# Allegro board FEB_DET_1V0.brd
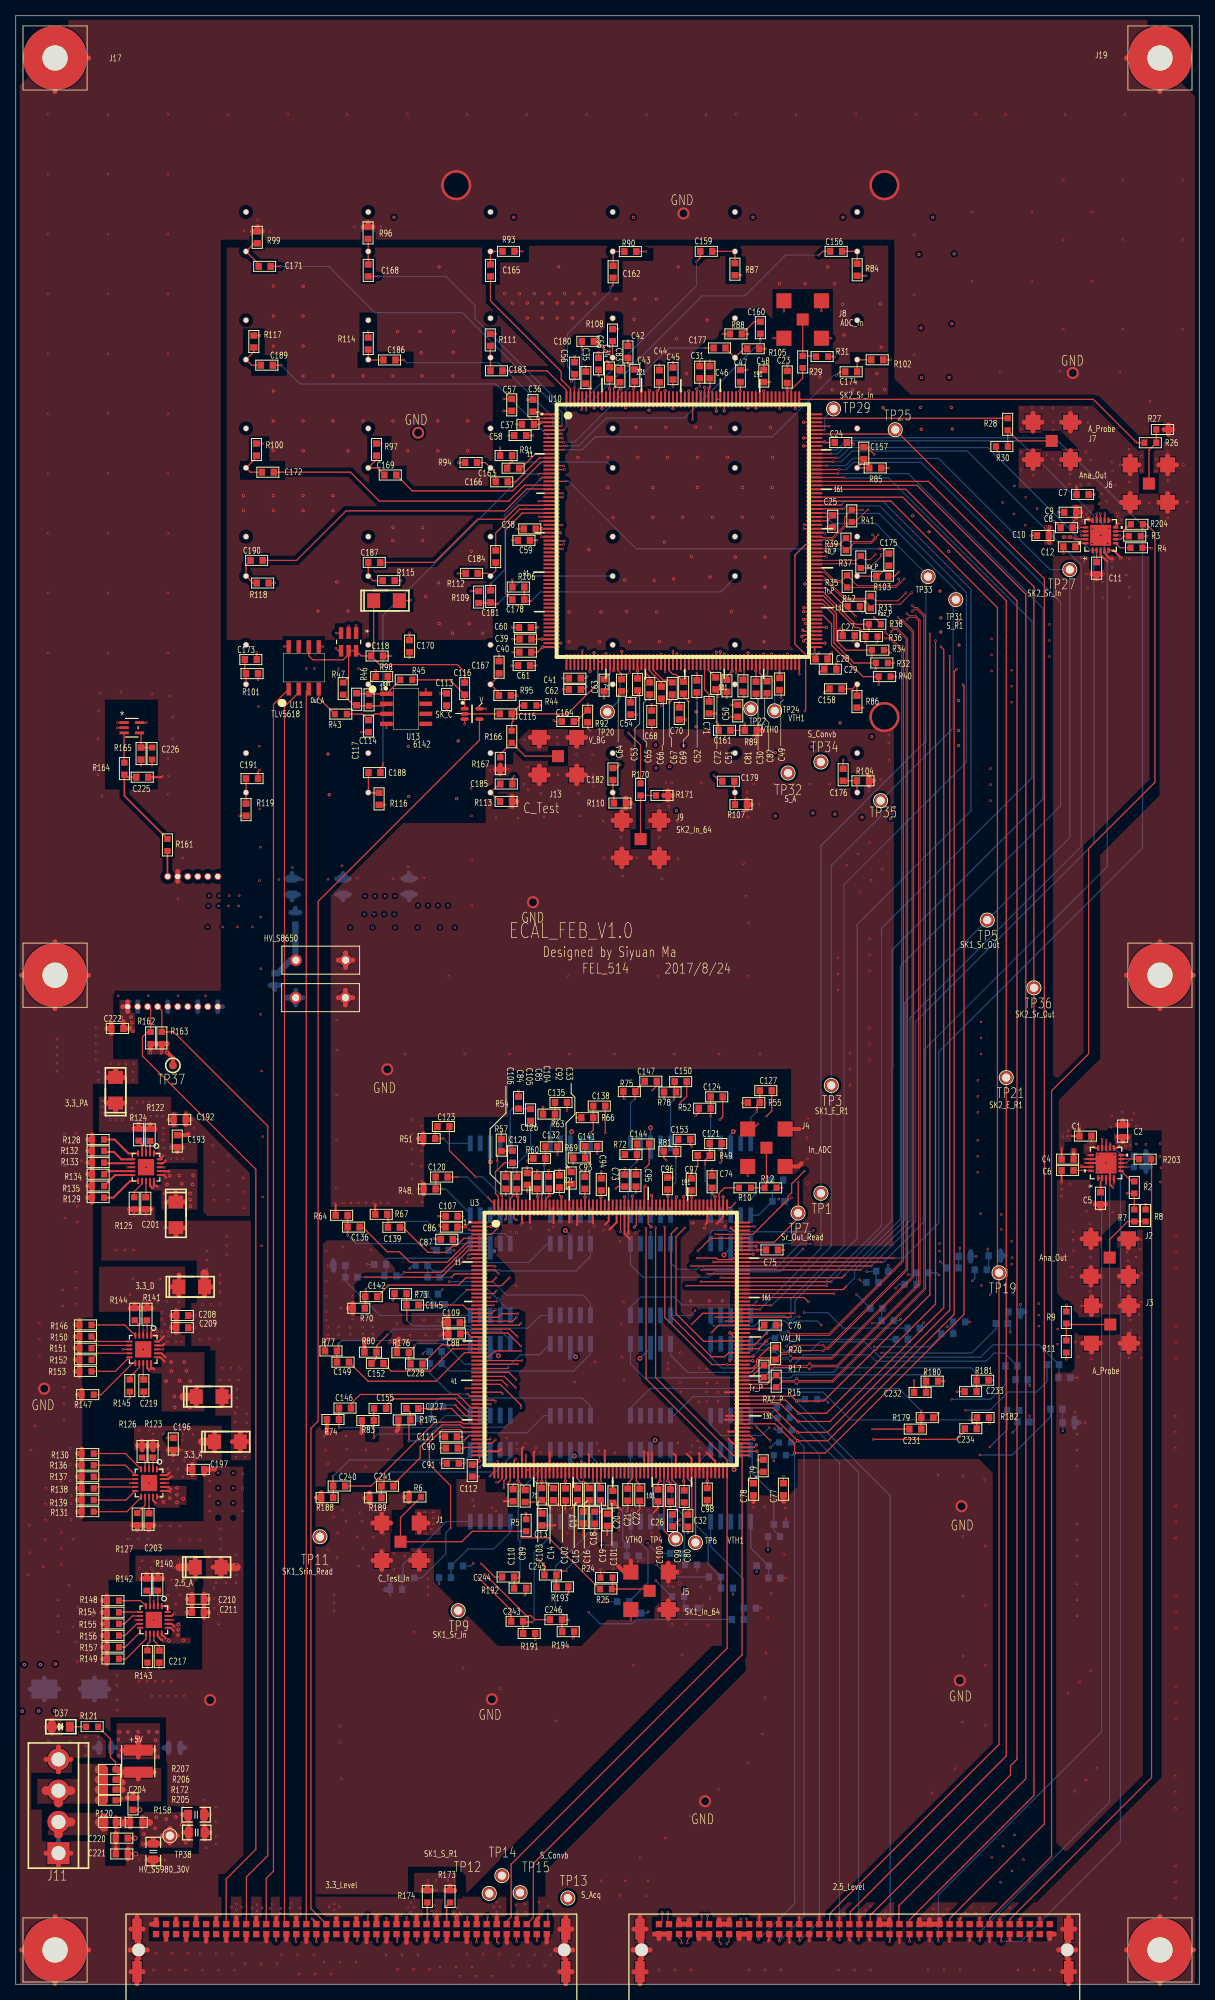
[diagram p0: board, top side]
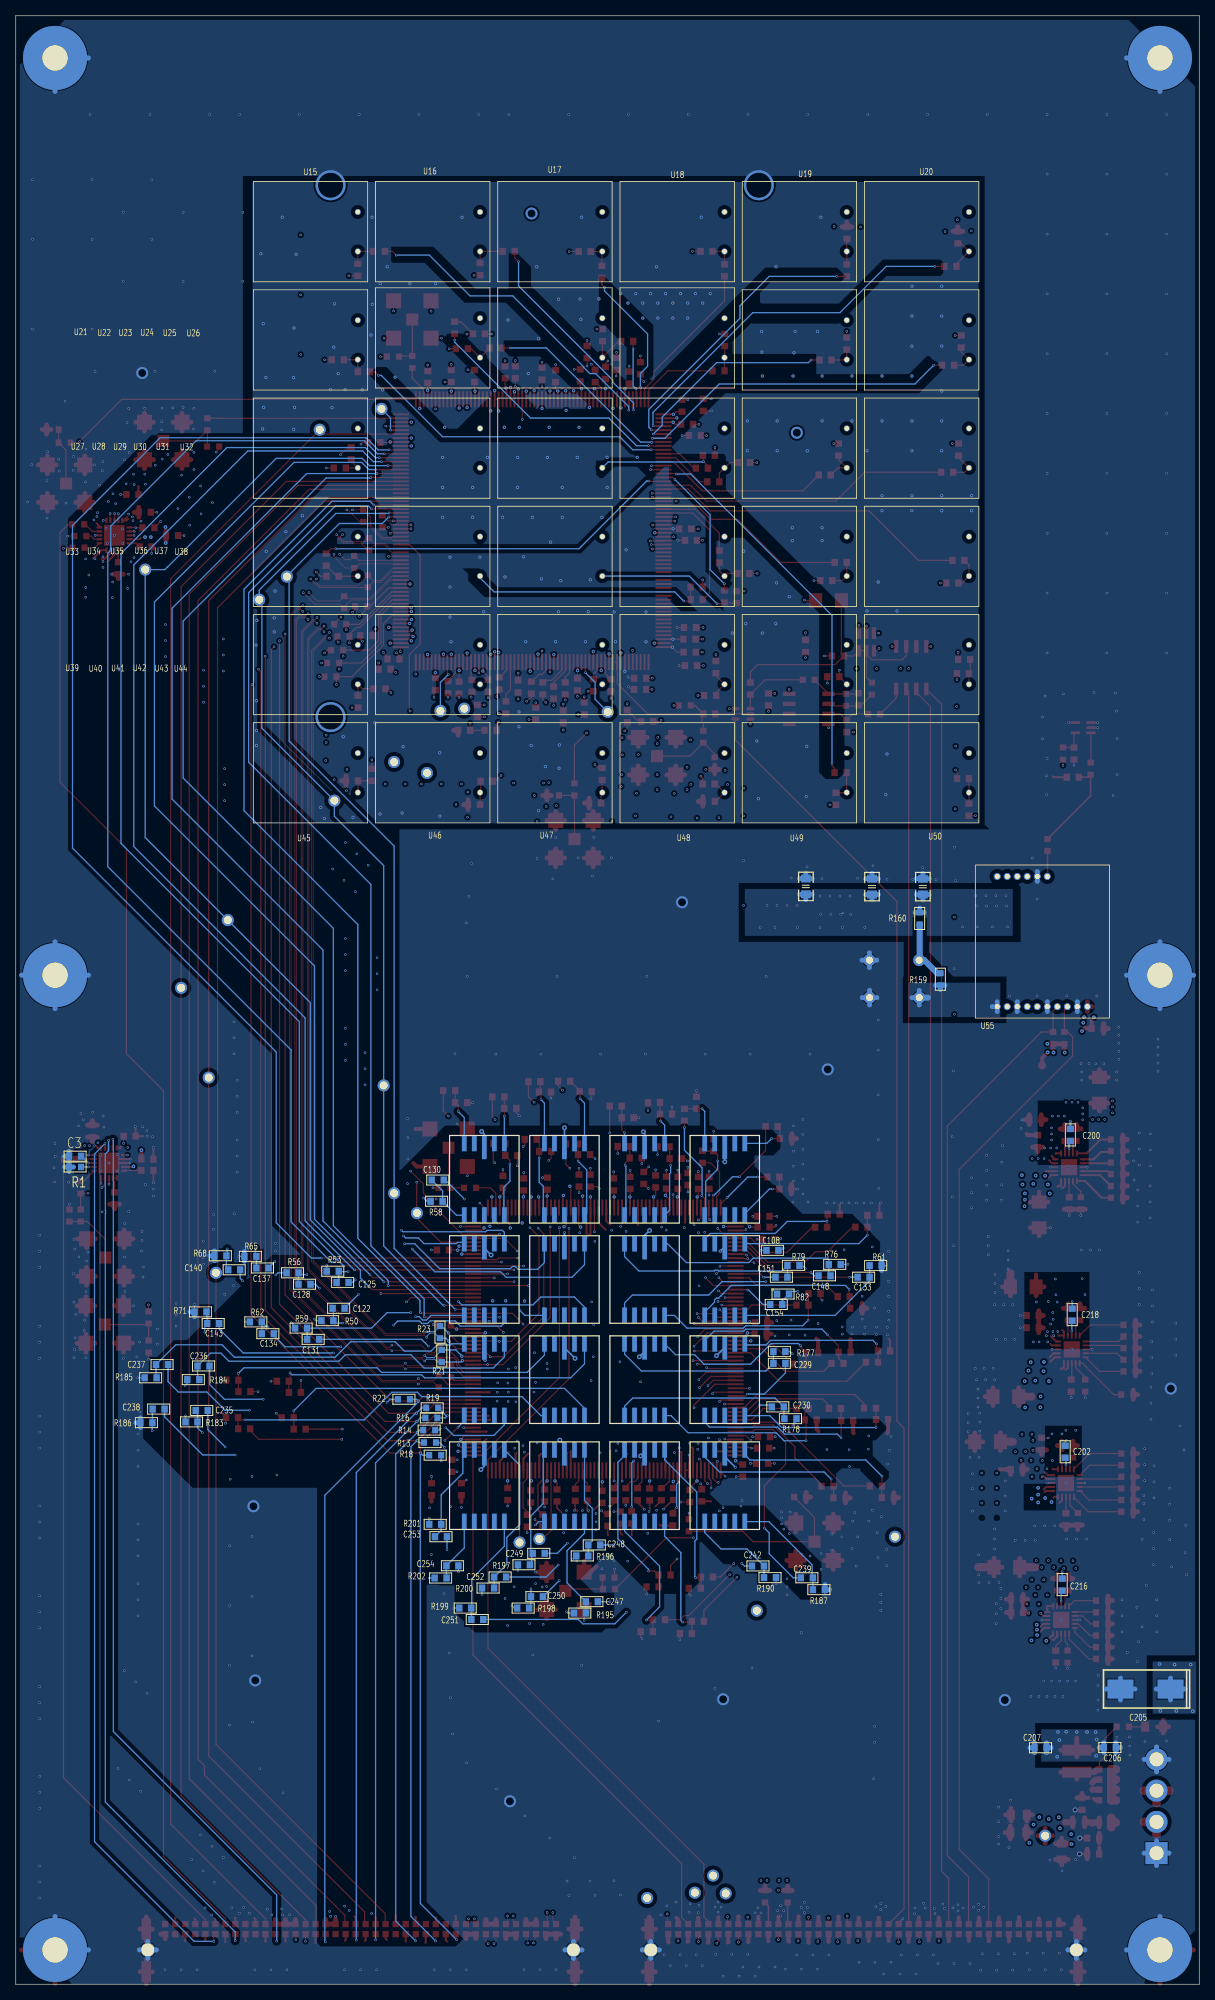
[diagram p1: board, bottom side, seen from below]

Outline 150.01 x 249.49 mm; copper layers: TOP, GND2, SIG3, PLANE4, PLANE5, SIG6, GND7, BOTTOM. Coordinates in mm from the lower left corner of the outline.
Outline path: 0,249.49 0,0 150.01,0 150.01,249.48 150,249.49 0,249.49

## Design rules (mm)
net group CK_5: nets N36210 N36222
net group CK_40: nets N36234 N36246
net group RAZ_CHN: nets N36138 N36150
net group TRIG_EXT: nets N36186 N36198
net group VAL_EVT: nets N36162 N36174

## Placement (name value [footprint] x y rotation side)
C1  0.1uF  [SC0603]  135.59 107.49 0 top
C2  0.1uF  [SC0603]  140.31 108.13 270 top
C3  0.1uF  [SC0603]  142.49 104.95 180 bottom
C4  0.1uF  [SC0603]  133.32 104.57 0 top
C5  10uF  [SC0603]  137.49 99.62 270 top
C6  0.1uF  [SC0603]  133.32 103.15 180 top
C7  0.1uF  [SC0603]  135.23 188.82 0 top
C8  0.1uF  [SC0603]  133.2 184.61 0 top
C9  0.1uF  [SC0603]  133.65 186.56 0 top
C10  0.1uF  [SC0603]  130.2 183.62 0 top
C11  10uF  [SC0603]  137.01 179.48 270 top
C12  0.1uF  [SC0603]  133.55 182.19 180 top
C13  0.1uF  [SC0603]  66.73 58.9 90 top
C14  0.1uF  [SC0603]  68.17 62.1 90 top
C15  0.1uF  [SC0603]  71.2 62.1 90 top
C16  0.1uF  [SC0603]  72.69 62.1 90 top
C17  0.1uF  [SC0603]  71.93 59.16 90 top
C18  0.1uF  [SC0603]  73.38 59.13 90 top
C19  0.1uF  [SC0603]  74.12 62.1 90 top
C20  0.1uF  [SC0603]  74.98 58.85 90 top
C21  0.1uF  [SC0603]  77.57 62.05 90 top
C22  0.1uF  [SC0603]  79.1 62.03 90 top
C23  0.1uF  [SC0603]  97.79 203.71 270 top
C24  0.1uF  [SC0603]  104.57 195.4 180 top
C25  0.1uF  [SC0603]  103.56 185.42 90 top
C26  0.1uF  [SC0603]  83.24 58.78 90 top
C27  0.1uF  [SC0603]  105.59 170.92 180 top
C28  0.1uF  [SC0603]  102.13 167.97 0 top
C29  0.1uF  [SC0603]  103.25 166.67 0 top
C30  0.1uF  [SC0603]  93.83 164.34 90 top
C31  0.1uF  [SC0603]  86.69 204.32 270 top
C32  0.1uF  [SC0603]  85.19 58.75 90 top
C33  0.1uF  [SC0603]  70.41 102.18 270 top
C34  0.1uF  [SC0603]  75.26 204.22 270 top
C35  0.1uF  [SC0603]  72.26 203.63 270 top
C36  0.1uF  [SC0603]  65.56 200.08 270 top
C37  0.1uF  [SC0603]  64.92 197.71 0 top
C38  0.1uF  [SC0603]  65.15 184.45 0 top
C39  0.1uF  [SC0603]  64.62 170.48 0 top
C40  0.1uF  [SC0603]  64.59 168.83 0 top
C41  0.1uF  [SC0603]  70.87 165.53 0 top
C42  0.1uF  [SC0603]  77.6 206.88 270 top
C43  0.1uF  [SC0603]  78.46 203.91 270 top
C44  0.1uF  [SC0603]  81.58 203.81 270 top
C45  0.1uF  [SC0603]  83.31 204.14 270 top
C46  0.1uF  [SC0603]  87.99 204.32 270 top
C47  0.1uF  [SC0603]  91.85 203.83 270 top
C48  0.1uF  [SC0603]  94.82 203.83 270 top
C49  0.1uF  [SC0603]  96.82 164.8 90 top
C50  0.1uF  [SC0603]  91.52 161.39 90 top
C51  0.1uF  [SC0603]  90.14 164.57 90 top
C52  0.1uF  [SC0603]  86.33 164.49 90 top
C53  0.1uF  [SC0603]  78.82 164.74 90 top
C54  0.1uF  [SC0603]  77.95 161.7 90 top
C55  10uF  [SC0603]  73.86 205.38 270 top
C56  10uF  [SC0603]  70.84 204.83 270 top
C57  10uF  [SC0603]  62.87 200.18 270 top
C58  10uF  [SC0603]  63.93 196.29 0 top
C59  10uF  [SC0603]  64.41 183.01 0 top
C60  10uF  [SC0603]  64.54 171.96 0 top
C61  10uF  [SC0603]  64.44 167.13 0 top
C62  10uF  [SC0603]  70.87 164.11 0 top
C63  0.1uF  [SC0603]  74.57 164.64 90 top
C64  0.1uF  [SC0603]  76.78 164.64 90 top
C65  0.1uF  [SC0603]  80.37 164.24 90 top
C66  0.1uF  [SC0603]  81.84 163.7 90 top
C67  0.1uF  [SC0603]  83.21 164.24 90 top
C68  0.1uF  [SC0603]  80.62 160.68 90 top
C69  0.1uF  [SC0603]  84.66 164.34 90 top
C70  0.1uF  [SC0603]  84.1 161.06 90 top
C71  0.1uF  [SC0603]  87.88 161.82 90 top
C72  0.1uF  [SC0603]  88.72 164.87 90 top
C73  0.1uF  [SC0603]  77.19 101.85 270 top
C74  0.1uF  [SC0603]  88.27 101.7 270 top
C75  0.1uF  [SC0603]  95.86 93.07 180 top
C76  0.1uF  [SC0603]  95.63 83.54 180 top
C77  0.1uF  [SC0603]  97.31 62.74 90 top
C78  0.1uF  [SC0603]  93.52 62.74 90 top
C79  0.1uF  [SC0603]  94.74 65.71 90 top
C80  0.1uF  [SC0603]  84.73 61.82 90 top
C81  0.1uF  [SC0603]  92.18 164.57 90 top
C82  0.1uF  [SC0603]  95.22 164.39 90 top
C83  0.1uF  [SC0603]  76.58 203.81 270 top
C84  0.1uF  [SC0603]  63.5 101.55 270 top
C85  0.1uF  [SC0603]  66.09 101.57 270 top
C86  0.1uF  [SC0603]  55.22 95.96 0 top
C87  0.1uF  [SC0603]  54.64 94.41 0 top
C88  0.1uF  [SC0603]  55.6 82.42 0 top
C89  0.1uF  [SC0603]  64.57 61.87 90 top
C90  0.1uF  [SC0603]  55.27 67.95 0 top
C91  0.1uF  [SC0603]  55.4 66.01 0 top
C92  0.1uF  [SC0603]  68.91 101.75 270 top
C93  0.1uF  [SC0603]  72.14 101.57 270 top
C94  0.1uF  [SC0603]  74.22 101.37 270 top
C95  0.1uF  [SC0603]  78.61 101.85 270 top
C96  0.1uF  [SC0603]  82.63 101.47 270 top
C97  0.1uF  [SC0603]  85.62 101.37 270 top
C98  0.1uF  [SC0603]  87.66 62.13 90 top
C99  0.1uF  [SC0603]  82.98 61.95 90 top
C100  0.1uF  [SC0603]  81.41 61.95 90 top
C101  0.1uF  [SC0603]  75.69 61.77 90 top
C102  0.1uF  [SC0603]  69.67 62.08 90 top
C103  0.1uF  [SC0603]  66.67 62.13 90 top
C104  0.1uF  [SC0603]  67.54 101.6 270 top
C105  10uF  [SC0603]  64.82 102.06 270 top
C106  10uF  [SC0603]  62.13 101.57 270 top
C107  10uF  [SC0603]  55.24 97.33 0 top
C108  10uF  [SC0603]  54.1 93.01 0 bottom
C109  10uF  [SC0603]  55.52 83.85 0 top
C110  10uF  [SC0603]  63.04 61.98 90 top
C111  10uF  [SC0603]  55.17 69.39 0 top
C112  10uF  [SC0603]  57.86 65.1 90 top
C113  0.1u  [SC0603]  54.61 162.84 90 top
C114  1uf  [SC0603]  44.7 159.46 90 top
C115  1pF  [SC0603]  62.1 161.01 180 top
C116  1nf  [SC0603]  56.9 164.21 270 top
C117  1uf  [SC0603]  43.21 162.86 90 top
C118  1uF  [SC0603]  45.8 168.35 0 top
C119  10uF  [CT1206]  46.99 175.36 0 top
C120  10n  [SC0603]  53.98 102.31 0 top
C121  10n  [SC0603]  88.72 106.55 0 top
C122  10n  [SC0603]  109.09 85.67 180 bottom
C123  10n  [SC0603]  54.2 108.71 0 top
C124  10n  [SC0603]  88.85 112.47 0 top
C125  10n  [SC0603]  108.58 88.95 180 bottom
C126  10n  [SC0603]  65.25 110.19 270 top
C127  10n  [SC0603]  95.07 113.26 0 top
C128  10n  [SC0603]  113.41 88.72 180 bottom
C129  10n  [SC0603]  62.97 104.88 270 top
C130  10n  [SC0603]  96.52 101.93 180 bottom
C131  10n  [SC0603]  112.32 81.74 180 bottom
C132  10n  [SC0603]  67.89 106.15 0 top
C133  10n  [SC0603]  42.55 89.61 0 bottom
C134  10n  [SC0603]  118.06 82.45 180 bottom
C135  10n  [SC0603]  69.11 111.76 0 top
C136  10n  [SC0603]  42.82 95.96 0 top
C137  10n  [SC0603]  118.75 90.78 180 bottom
C138  10n  [SC0603]  73.96 111.3 0 top
C139  10n  [SC0603]  47.93 95.94 0 top
C140  10n  [SC0603]  122.33 90.55 180 bottom
C141  10n  [SC0603]  72.95 106.2 0 top
C142  10n  [SC0603]  45.06 87.15 0 top
C143  10n  [SC0603]  124.99 83.74 180 bottom
C144  10n  [SC0603]  79.53 106.5 0 top
C145  10n  [SC0603]  50.29 86.08 0 top
C146  10n  [SC0603]  41.73 73.03 0 top
C147  10n  [SC0603]  80.49 114.45 0 top
C148  10n  [SC0603]  47.5 89.79 0 bottom
C149  10n  [SC0603]  41.48 78.84 0 top
C150  10n  [SC0603]  84.28 114.4 0 top
C151  10n  [SC0603]  52.96 89.61 0 bottom
C152  10n  [SC0603]  45.85 78.69 0 top
C153  10n  [SC0603]  84.73 107.09 0 top
C154  10n  [SC0603]  53.62 86.16 0 bottom
C155  10n  [SC0603]  46.18 72.97 0 top
C156  10n  [SC0603]  103.99 219.63 180 top
C157  10n  [SC0603]  107.49 194.06 90 top
C158  10n  [SC0603]  103.91 164.19 180 top
C159  10n  [SC0603]  87.53 219.63 180 top
C160  10n  [SC0603]  94.39 209.96 270 top
C161  10n  [SC0603]  89.84 158.93 180 top
C162  10n  [SC0603]  75.72 217.04 270 top
C163  10n  [SC0603]  63.04 192.15 0 top
C164  10n  [SC0603]  69.98 160.05 180 top
C165  10n  [SC0603]  60.17 217.22 270 top
C166  10n  [SC0603]  61.59 190.42 0 top
C167  10n  [SC0603]  61.26 166.93 90 top
C168  10n  [SC0603]  44.68 217.22 270 top
C169  10n  [SC0603]  47.47 191.29 0 top
C170  10n  [SC0603]  49.91 169.6 90 top
C171  10n  [SC0603]  31.55 217.73 0 top
C172  10n  [SC0603]  31.95 191.64 0 top
C173  10n  [SC0603]  29.79 167.89 0 top
C174  10n  [SC0603]  105.89 204.37 180 top
C175  10n  [SC0603]  110.67 180.57 90 top
C176  10n  [SC0603]  104.88 153.29 90 top
C177  10n  [SC0603]  89.2 207.39 180 top
C178  10n  [SC0603]  63.7 175.49 180 top
C179  10n  [SC0603]  90.32 152.48 180 top
C180  10n  [SC0603]  72.52 208.23 180 top
C181  10n  [SC0603]  60.2 175.89 90 top
C182  10n  [SC0603]  75.69 153.39 90 top
C183  10n  [SC0603]  60.93 204.5 0 top
C184  10n  [SC0603]  60.83 180.95 90 top
C185  10n  [SC0603]  62.18 152.12 0 top
C186  10n  [SC0603]  47.37 205.87 0 top
C187  10n  [SC0603]  45.44 180.21 0 top
C188  10n  [SC0603]  45.47 153.57 0 top
C189  10n  [SC0603]  31.83 205.21 0 top
C190  10n  [SC0603]  30.53 180.47 0 top
C191  10n  [SC0603]  29.95 152.81 0 top
C192  10uF  [SC0603]  20.78 109.58 0 top
C193  10uF  [SC0603]  20.47 106.86 90 top
C194  47uF  [CT1206]  12.65 113.31 90 top
C195  47uF  [CT1206]  20.29 97.51 270 top
C196  10uF  [SC0603]  19.96 68.48 90 top
C197  10uF  [SC0603]  23.14 65.25 0 top
C198  47uF  [CT1206]  26.82 68.76 0 top
C200  0.01uF  [SC0603]  16.33 107.65 270 bottom
C201  0.01uF  [SC0603]  16.48 98.98 270 top
C202  0.01uF  [SC0603]  16.99 67.49 270 bottom
C203  0.01uF  [SC0603]  16.89 58.93 270 top
C204  10uF  [SC0603]  14.86 22.86 270 top
C205  100uF  [STC7343]  6.81 37.41 0 bottom
C206  10uF  [SC0603]  11.33 30 180 bottom
C207  10uF  [SC0603]  20.12 29.97 0 bottom
C208  10uF  [SC0603]  21.11 84.76 0 top
C209  10uF  [SC0603]  21.11 83.21 0 top
C210  10uF  [SC0603]  23.09 48.79 0 top
C211  10uF  [SC0603]  23.09 47.12 0 top
C212  47uF  [CT1206]  22.3 88.39 0 top
C213  47uF  [CT1206]  24.51 74.47 0 top
C214  47uF  [CT1206]  24.38 52.86 0 top
C216  0.01uF  [SC0603]  17.37 50.65 270 bottom
C217  0.01uF  [SC0603]  18.19 41.53 270 top
C218  0.01uF  [SC0603]  16.1 84.86 270 bottom
C219  0.01uF  [SC0603]  16.23 75.87 270 top
C220  10uF  [SC0603]  13.44 18.52 0 top
C221  10uF  [SC0603]  13.44 16.51 0 top
C222  0.1u  [SC0603]  12.88 121.13 0 top
C223  47n  [CHV]  35.48 125.04 0 top
C224  47n  [CHV]  35.51 129.79 0 top
C225  0.1u  [SC0603]  16.03 152.98 0 top
C226  0.1u  [SC0603]  15.88 155.98 270 top
C227  10n  [SC0603]  50.27 72.97 0 top
C228  10n  [SC0603]  50.8 78.61 0 top
C229  10n  [SC0603]  53.21 78.69 180 bottom
C230  10n  [SC0603]  53.42 73.18 0 bottom
C231  10n  [SC0603]  114.02 70.36 180 top
C232  10n  [SC0603]  114.63 75.01 180 top
C233  10n  [SC0603]  121.03 75.11 180 top
C234  10n  [SC0603]  121.06 70.41 180 top
C235  10n  [SC0603]  126.44 72.72 180 bottom
C236  10n  [SC0603]  126.21 78.36 180 bottom
C237  10n  [SC0603]  131.47 78.54 180 bottom
C238  10n  [SC0603]  131.9 72.9 180 bottom
C239  10n  [SC0603]  49.73 51.51 0 bottom
C240  10n  [SC0603]  41 63.14 0 top
C241  10n  [SC0603]  47.12 63.12 0 top
C242  10n  [SC0603]  55.93 53.01 0 bottom
C243  10n  [SC0603]  63.55 46 180 top
C244  10n  [SC0603]  62.41 51.61 180 top
C245  10n  [SC0603]  67.77 51.87 180 top
C246  10n  [SC0603]  68.48 46.2 180 top
C247  10n  [SC0603]  76.99 48.49 180 bottom
C248  10n  [SC0603]  76.68 55.68 180 bottom
C249  10n  [SC0603]  83.72 54.61 180 bottom
C250  10n  [SC0603]  83.95 49.12 180 bottom
C251  10n  [SC0603]  91.52 46.23 180 bottom
C252  10n  [SC0603]  88.62 51.61 180 bottom
C253  10n  [SC0603]  96.11 56.72 180 bottom
C254  10n  [SC0603]  94.67 53.04 180 bottom
C255  1uF  [SC0805]  41.48 139.12 90 bottom
C256  1uF  [SC0805]  35.03 139.12 90 bottom
C257  1uF  [SC0805]  49.86 139.14 90 bottom
C258  1uF  [SC0805]  22.94 19.23 0 top
C259  1uF  [SC0805]  22.86 21.49 0 top
C260  1uF  [SC0805]  17.42 16.81 270 top
D1  -  [S5980]  64.54 96.72 180 bottom
D2  -  [S5980]  74.7 96.72 180 bottom
D3  -  [S5980]  84.86 96.72 180 bottom
D4  -  [S5980]  95.02 96.72 180 bottom
D7  -  [S5980]  64.54 84.02 180 bottom
D8  -  [S5980]  74.7 84.02 180 bottom
D9  -  [S5980]  84.86 84.02 180 bottom
D10  -  [S5980]  95.02 84.02 180 bottom
D13  -  [S5980]  64.54 71.32 180 bottom
D14  -  [S5980]  74.7 71.32 180 bottom
D15  -  [S5980]  84.86 71.32 180 bottom
D16  -  [S5980]  95.02 71.32 180 bottom
D17  -  [S5980]  64.54 57.89 180 bottom
D18  -  [S5980]  74.7 57.89 180 bottom
D19  -  [S5980]  84.86 57.89 180 bottom
D20  -  [S5980]  95.02 57.89 180 bottom
D37  Green  [SD0805]  5.71 32.64 180 top
J1  SMA_Plated  [SMA_PLATED]  48.77 56.08 0 top
J2  SMA_Plated  [SMA_PLATED]  138.66 92.1 0 top
J3  SMA_Plated  [SMA_PLATED]  138.73 83.62 0 top
J4  SMA_Plated  [SMA_PLATED]  95.15 106.02 0 top
J5  SMA_Plated  [SMA_PLATED]  80.34 49.86 0 top
J6  SMA_Plated  [SMA_PLATED]  143.64 190.2 0 top
J7  SMA_Plated  [SMA_PLATED]  131.32 195.61 0 top
J8  SMA_Plated  [SMA_PLATED]  99.75 211 0 top
J9  SMA_Plated  [SMA_PLATED]  79.2 145.14 0 top
J10  CONN  [154744-ERNI]  131.06 6.35 270 top
J11  Power In  [SIP-4P-156]  5.41 22.56 90 top
J12  CONN  [154744-ERNI]  67.31 6.35 270 top
J13  SMA_Plated  [SMA_PLATED]  68.73 155.65 0 top
J14  2mm_Hole  [2MM_HOLE]  4.98 4.34 0 top
J15  2mm_Hole  [2MM_HOLE]  145.03 4.34 0 top
J16  2mm_Hole  [2MM_HOLE]  4.98 127.89 0 top
J17  2mm_Hole  [2MM_HOLE]  4.98 244.14 0 top
J18  2mm_Hole  [2MM_HOLE]  145.03 127.89 0 top
J19  2mm_Hole  [2MM_HOLE]  145.03 244.14 0 top
L1  Ferrite  [XAL4020]  15.52 28.27 90 top
NOREF  -  []  95.22 15.01 0 top
NOREF#2  -  []  115.27 137.46 0 top
NOREF#3  -  []  0 249.48 0 top
NOREF#4  -  []  82.22 12.14 0 top
NOREF#5  -  []  112.45 138.56 0 top
NOREF#6  -  []  4.98 127.89 90 top
NOREF#7  -  []  110.11 160.6 90 top
NOREF#8  -  []  4.98 244.14 0 top
NOREF#9  -  []  97.51 14.63 0 top
NOREF#10  -  []  0.18 0 90 top
NOREF#11  -  []  91.52 13.59 0 top
NOREF#12  -  []  69.52 4.35 0 top
NOREF#13  -  []  113.69 138.4 0 top
NOREF#14  -  []  112.98 138.4 0 top
NOREF#15  -  []  55.83 228.02 0 top
NOREF#16  -  []  85.04 11.71 0 top
NOREF#17  -  []  114.5 137.97 0 top
NOREF#18  -  []  4.98 4.34 90 top
R1  0  [SR0603]  142.49 103.58 0 bottom
R2  0  [SR0603]  141.78 100.99 270 top
R3  0  [SR0603]  141.83 183.54 0 top
R4  0  [SR0603]  142.06 182.07 0 top
R5  test  [SR0603]  64.69 58.17 90 top
R6  test  [SR0603]  50.6 61.75 180 top
R7  test  [SR0603]  141.78 97.43 90 top
R8  test  [SR0603]  143.21 97.43 90 top
R9  test  [SR0603]  133.17 84.51 90 top
R10  test  [SR0603]  92.43 100.94 180 top
R11  test  [SR0603]  133.17 80.82 270 top
R12  test  [SR0603]  95.68 100.94 0 top
R13  50  [SR0603]  97.51 68.66 180 bottom
R14  50  [SR0603]  97.61 70.23 180 bottom
R15  test  [SR0603]  96.39 76.43 90 top
R16  50  [SR0603]  97.33 71.78 180 bottom
R17  test  [SR0603]  94.84 77.7 90 top
R18  50  [SR0603]  96.85 67.06 180 bottom
R19  50  [SR0603]  97.23 73.05 180 bottom
R20  test  [SR0603]  96.32 79.93 90 top
R21  test  [SR0603]  96.01 79.63 90 bottom
R22  50  [SR0603]  100.81 74.14 0 bottom
R23  test  [SR0603]  96.24 82.65 90 bottom
R24  test  [SR0603]  74.88 51.54 180 top
R25  test  [SR0603]  74.8 50.09 180 top
R26  test  [SR0603]  143.81 195.38 180 top
R27  test  [SR0603]  145.34 197.05 0 top
R28  test  [SR0603]  125.73 197.71 90 top
R29  test  [SR0603]  99.75 205.61 270 top
R30  test  [SR0603]  124.99 194.89 180 top
R31  test  [SR0603]  102.21 206.3 0 top
R32  50  [SR0603]  109.78 167.46 0 top
R33  test  [SR0603]  108.38 175.16 90 top
R34  50  [SR0603]  109.27 169.09 0 top
R35  test  [SR0603]  105.38 177.8 90 top
R36  50  [SR0603]  108.48 170.81 0 top
R37  test  [SR0603]  107.11 180.26 90 top
R38  50  [SR0603]  108.89 172.36 0 top
R39  test  [SR0603]  105.23 182.52 90 top
R40  50  [SR0603]  110.13 165.73 0 top
R41  test  [SR0603]  105.97 186.11 90 top
R42  50  [SR0603]  106.22 174.65 0 top
R43  100  [SR0603]  41.2 160.99 0 top
R44  5k  [SR0603]  65.23 162.08 0 top
R45  200  [SR0603]  49.5 165.33 180 top
R46  10k  [SR0603]  44.78 162.79 90 top
R47  40k  [SR0603]  41.5 164.21 270 top
R48  100k  [R0603]  52.45 100.79 0 top
R49  100k  [R0603]  87.2 105.03 0 top
R50  100k  [R0603]  110.52 84.1 180 bottom
R51  100k  [R0603]  52.4 107.19 0 top
R52  100k  [R0603]  87.33 111.02 0 top
R53  100k  [R0603]  109.83 90.37 180 bottom
R54  100k  [R0603]  63.73 111.73 270 top
R55  100k  [R0603]  93.55 111.73 0 top
R56  100k  [R0603]  114.94 90.17 180 bottom
R57  100k  [R0603]  61.54 106.35 270 top
R58  100k  [R0603]  96.67 99.24 180 bottom
R59  100k  [R0603]  113.84 83.16 180 bottom
R60  100k  [R0603]  66.37 104.65 0 top
R61  100k  [R0603]  41.02 91.08 0 bottom
R62  100k  [R0603]  119.58 83.95 180 bottom
R63  100k  [R0603]  67.59 110.29 0 top
R64  100k  [R0603]  41.3 97.46 0 top
R65  100k  [R0603]  120.27 92.25 180 bottom
R66  100k  [R0603]  72.44 109.83 0 top
R67  100k  [R0603]  46.33 97.59 0 top
R68  100k  [R0603]  124.08 92.33 180 bottom
R69  100k  [R0603]  71.42 104.72 0 top
R70  100k  [R0603]  43.48 85.67 0 top
R71  100k  [R0603]  126.59 85.22 180 bottom
R72  100k  [R0603]  77.98 105.16 0 top
R73  100k  [R0603]  48.77 87.53 0 top
R74  100k  [R0603]  40.21 71.58 0 top
R75  100k  [R0603]  77.77 113.13 0 top
R76  100k  [R0603]  46.2 91.24 0 bottom
R77  100k  [R0603]  39.95 80.26 0 top
R78  100k  [R0603]  82.93 113.08 0 top
R79  100k  [R0603]  51.44 91.11 0 bottom
R80  100k  [R0603]  44.96 80.11 0 top
R81  100k  [R0603]  82.91 105.56 0 top
R82  100k  [R0603]  52.76 87.48 180 bottom
R83  100k  [R0603]  44.63 71.45 0 top
R84  1M  [R0603]  106.65 217.3 90 top
R85  1M  [R0603]  108.94 192.18 180 top
R86  1M  [R0603]  106.63 162.56 90 top
R87  1M  [R0603]  91.16 217.37 90 top
R88  1M  [R0603]  91.29 209.17 0 top
R89  1M  [R0603]  93.17 158.93 180 top
R90  1M  [R0603]  77.9 219.61 180 top
R91  1M  [R0603]  62.15 193.75 0 top
R92  1M  [R0603]  72.49 160.71 90 top
R93  1M  [R0603]  62.46 219.63 180 top
R94  1M  [R0603]  57.71 192.86 0 top
R95  1M  [R0603]  62 163.35 180 top
R96  1M  [R0603]  44.65 221.97 270 top
R97  1M  [R0603]  45.72 194.51 270 top
R98  1M  [R0603]  46.38 165.73 180 top
R99  1M  [R0603]  30.61 221.41 270 top
R100  1M  [R0603]  30.51 194.51 270 top
R101  1M  [R0603]  29.95 166.12 180 top
R102  1M  [R0603]  109.19 205.89 180 top
R103  1M  [R0603]  109.86 178.46 180 top
R104  1M  [R0603]  107.39 152.53 180 top
R105  1M  [R0603]  93.47 207.29 180 top
R106  1M  [R0603]  63.7 177.09 0 top
R107  1M  [R0603]  91.92 149.5 180 top
R108  1M  [R0603]  75.64 209.02 270 top
R109  1M  [R0603]  58.67 175.82 270 top
R110  1M  [R0603]  76.58 149.71 180 top
R111  1M  [R0603]  60.15 208.41 270 top
R112  1M  [R0603]  57.78 178.82 0 top
R113  1M  [R0603]  62.15 149.91 180 top
R114  1M  [R0603]  44.68 207.95 270 top
R115  1M  [R0603]  47.27 177.9 180 top
R116  1M  [R0603]  46.05 150.24 90 top
R117  1M  [R0603]  30.18 208.2 270 top
R118  1M  [R0603]  31.29 177.6 180 top
R119  1M  [R0603]  29.18 148.87 90 top
R120  0  [SR0603]  11.91 20.5 0 top
R121  1.5k  [SR0603]  9.68 32.64 180 top
R122  0  [SR0603]  17.04 107.65 270 top
R123  0  [SR0603]  17.4 67.51 270 top
R124  50k  [SR0603]  15.57 107.67 270 top
R125  open  [SR0603]  15.01 98.98 270 top
R126  50k  [SR0603]  16 67.51 270 top
R127  open  [SR0603]  15.39 58.95 270 top
R128  open  [SR0603]  10.44 107.06 180 top
R129  0  [SR0603]  10.44 99.7 180 top
R130  open  [SR0603]  9.12 67.26 180 top
R131  0  [SR0603]  9.12 59.89 180 top
R132  0  [SR0603]  10.44 105.61 180 top
R133  open  [SR0603]  10.44 104.14 180 top
R134  open  [SR0603]  10.44 102.67 180 top
R135  0  [SR0603]  10.44 101.17 180 top
R136  0  [SR0603]  9.12 65.79 180 top
R137  open  [SR0603]  9.12 64.31 180 top
R138  open  [SR0603]  9.12 62.84 180 top
R139  0  [SR0603]  9.12 61.37 180 top
R140  0  [SR0603]  18.01 50.65 270 top
R141  0  [SR0603]  16.64 84.91 270 top
R142  50k  [SR0603]  16.59 50.65 270 top
R143  open  [SR0603]  16.69 41.53 270 top
R144  50k  [SR0603]  15.09 84.91 270 top
R145  open  [SR0603]  14.45 75.87 270 top
R146  open  [SR0603]  8.84 83.57 180 top
R147  0  [SR0603]  9.12 74.73 180 top
R148  open  [SR0603]  12.32 48.62 180 top
R149  0  [SR0603]  12.32 41.22 180 top
R150  0  [SR0603]  8.84 82.09 180 top
R151  open  [SR0603]  8.84 80.62 180 top
R152  open  [SR0603]  8.84 79.15 180 top
R153  0  [SR0603]  8.84 77.67 180 top
R154  0  [SR0603]  12.32 47.14 180 top
R155  open  [SR0603]  12.32 45.67 180 top
R156  open  [SR0603]  12.32 44.2 180 top
R157  open  [SR0603]  12.32 42.72 180 top
R158  0  [SR0603]  15.27 20.52 0 top
R159  10  [SR0603]  32.82 127.38 90 bottom
R160  0  [SR0603]  35.43 135.08 90 bottom
R161  1k  [SR0603]  19.23 144.4 270 top
R162  6.4k  [SR0603]  17.09 119.94 90 top
R163  6.4k  [SR0603]  18.52 119.94 90 top
R164  1.5k  [SR0603]  13.77 154.08 90 top
R165  10  [SR0603]  17.27 155.98 90 top
R166  test  [SR0603]  62.87 158.11 90 top
R167  test  [SR0603]  61.42 154.74 270 top
R170  test  [SR0603]  79.2 151.43 90 top
R171  test  [SR0603]  81.92 150.67 0 top
R172  0  [SR0603]  11.89 24.66 0 top
R173  0  [SR0603]  55.04 11.13 90 top
R174  0  [SR0603]  52.17 11.13 90 top
R175  100k  [R0603]  49.25 71.53 0 top
R176  100k  [R0603]  49.07 80.04 0 top
R177  100k  [R0603]  53.21 80.19 0 bottom
R178  100k  [R0603]  51.82 71.68 0 bottom
R179  100k  [R0603]  115.54 71.81 180 top
R180  100k  [R0603]  116.15 76.43 180 top
R181  100k  [R0603]  122.56 76.56 180 top
R182  100k  [R0603]  122.61 71.83 180 top
R183  100k  [R0603]  127.74 71.27 180 bottom
R184  100k  [R0603]  127.51 76.63 180 bottom
R185  100k  [R0603]  132.92 76.86 180 bottom
R186  100k  [R0603]  133.45 71.17 180 bottom
R187  100k  [R0603]  48.21 50.01 0 bottom
R188  100k  [R0603]  39.47 61.67 0 top
R189  100k  [R0603]  45.59 61.65 0 top
R190  100k  [R0603]  54.41 51.54 0 bottom
R191  100k  [R0603]  65.07 44.45 180 top
R192  100k  [R0603]  63.93 50.19 180 top
R193  100k  [R0603]  69.29 50.37 180 top
R194  100k  [R0603]  70.03 44.68 180 top
R195  100k  [R0603]  78.51 47.04 180 bottom
R196  100k  [R0603]  78.21 54.28 180 bottom
R197  100k  [R0603]  85.6 53.16 180 bottom
R198  100k  [R0603]  85.7 47.68 180 bottom
R199  100k  [R0603]  93.04 47.68 180 bottom
R200  100k  [R0603]  90.14 50.22 180 bottom
R201  100k  [R0603]  96.85 58.29 180 bottom
R202  100k  [R0603]  96.16 51.49 180 bottom
R203  0  [SR0603]  143.15 104.57 0 top
R204  0  [SR0603]  142.11 185.04 0 top
R205  0  [SR0603]  11.89 23.32 0 top
R206  0  [SR0603]  11.89 25.93 0 top
R207  0  [SR0603]  11.89 27.23 0 top
TP1  SK1_End_Readout2  [GND40]  102.06 100.25 0 top
TP3  SK1_End_Readout1  [GND40]  103.38 113.92 0 top
TP4  SK1_VTH0  [GND40]  83.64 56.44 0 top
TP5  SK1_Sr_Out  [GND40]  123.14 134.87 0 top
TP6  SK1_VTH1  [GND40]  86.16 55.98 0 top
TP7  SK1_Srout_Read  [GND40]  99.16 97.74 0 top
TP9  SK1_Sr_In  [GND40]  56.08 47.35 0 top
TP11  SK1_Srin_Read  [GND40]  38.56 56.72 0 top
TP12  SK1_Start_Readout1  [GND40]  60.02 11.51 0 top
TP13  SK1_Start_Acq  [GND40]  69.98 10.92 0 top
TP14  SK1_Start_Readout2  [GND40]  61.62 13.77 0 top
TP15  SK1_Start_Convb  [GND40]  63.93 11.61 0 top
TP19  SK2_End_Readout2  [GND40]  124.64 90.17 0 top
TP20  SK2_V_BG  [GND40]  74.98 161.26 0 top
TP21  SK2_End_Readout1  [GND40]  125.55 114.91 0 top
TP22  SK2_VTH0  [GND40]  93.17 161.67 0 top
TP24  SK2_VTH1  [GND40]  96.19 161.39 0 top
TP25  SK2_Srout_Read  [GND40]  111.48 197.03 0 top
TP27  SK2_Sr_In  [GND40]  133.6 179.3 0 top
TP29  SK2_Srin_Read  [GND40]  103.66 199.67 0 top
TP31  SK2_Start_Readout1  [GND40]  119.15 175.49 0 top
TP32  SK2_Start_Acq  [GND40]  97.89 153.52 0 top
TP33  SK2_Start_Readout2  [GND40]  115.65 178.41 0 top
TP34  SK2_Start_Convb  [GND40]  102.06 154.91 0 top
TP35  SK2_Start_Readout1  [GND40]  109.63 150.01 0 top
TP36  SK2_Sr_Out  [GND40]  129.06 126.29 0 top
TP37  TEST POINT  [TP-40-SMD]  19.91 116.46 0 top
TP38  TEST POINT  [GND40]  19.53 18.82 0 top
U1  Value  [AD7944]  138.2 104.09 90 top
U2  Value  [AD7944]  137.52 183.64 90 top
U3  -  [SKIROC2]  75.41 81.79 0 top
U10  -  [SKIROC2]  84.56 184.23 0 top
U11  TLV5618AM  [TLV5618_D_DFP]  36.5 166.85 0 top
U12  ADG741  [SOT65P210X110-5N]  57.84 161.01 0 top
U13  LM6142AMJ-QML  [LM6142_DFP]  49.48 161.65 270 top
U14  REF3212  [DBV6]  42.19 170.13 270 top
U15  -  [S8650]  106.65 222.12 180 bottom
U16  -  [S8650]  91.16 222.12 180 bottom
U17  -  [S8650]  75.67 222.12 180 bottom
U18  -  [S8650]  60.17 222.12 180 bottom
U19  -  [S8650]  44.68 222.12 180 bottom
U20  -  [S8650]  29.18 222.12 180 bottom
U21  -  [S8650]  106.65 208.41 180 bottom
U22  -  [S8650]  91.16 208.66 180 bottom
U23  -  [S8650]  75.67 208.66 180 bottom
U24  -  [S8650]  60.17 208.66 180 bottom
U25  -  [S8650]  44.68 208.41 180 bottom
U26  -  [S8650]  29.18 208.41 180 bottom
U27  -  [S8650]  106.65 194.69 180 bottom
U28  -  [S8650]  91.16 194.69 180 bottom
U29  -  [S8650]  75.67 194.69 180 bottom
U30  -  [S8650]  60.17 194.69 180 bottom
U31  -  [S8650]  44.68 194.69 180 bottom
U32  -  [S8650]  29.18 194.69 180 bottom
U33  -  [S8650]  106.65 180.97 180 bottom
U34  -  [S8650]  91.16 180.97 180 bottom
U35  -  [S8650]  75.67 180.97 180 bottom
U36  -  [S8650]  60.17 180.97 180 bottom
U37  -  [S8650]  44.68 180.97 180 bottom
U38  -  [S8650]  29.18 180.97 180 bottom
U39  -  [S8650]  106.65 167.26 180 bottom
U40  -  [S8650]  91.16 167.26 180 bottom
U41  -  [S8650]  75.67 167.26 180 bottom
U42  -  [S8650]  60.17 167.26 180 bottom
U43  -  [S8650]  44.68 167.26 180 bottom
U44  -  [S8650]  29.18 167.26 180 bottom
U45  -  [S8650]  106.65 153.54 180 bottom
U46  -  [S8650]  91.16 153.54 180 bottom
U47  -  [S8650]  75.67 153.54 180 bottom
U48  -  [S8650]  60.17 153.54 180 bottom
U49  -  [S8650]  44.68 153.54 180 bottom
U50  -  [S8650]  29.18 153.54 180 bottom
U51  -  [TPS7A85]  16.51 103.56 270 top
U52  -  [TPS7A85]  16.89 63.53 270 top
U53  -  [TPS7A85]  16.15 80.47 270 top
U54  -  [TPS7A85]  17.5 46.18 270 top
U55  C11204-01  [C11204_01]  11.38 122.45 90 bottom
U56  LM94021  [MAA05A]  14.71 159.26 0 top

## Library data of the parts
C1-C112 C118 C192-C198 C208-C214 C220-C226 = CAP NP
C113 C115 C119 C200-C203 C216-C219 = C
C114 C116 C117 C120-C191 C227-C254 = CAPACITOR NON-POL
C204-C207 = CAP
C255-C260 = CAP NP: Tolerance: tol*
D1-D4 D7-D10 D13-D20 = Si_Pin detector
D37 = LED
J1-J9 J13 = SMA_0
J10 J12 = CONN_1
J11 = 4 HEADER
J14-J19 = 2mm_Hole
L1 = INDUCTOR
R1-R119 R122-R124 R126 R128-R142 R144 R146-R157 R159-R167 R170 R171 R175-R204 = R
R120 R121 R125 R127 R143 R145 R158 R172-R174 R205-R207 = Resistor
TP1 TP3-TP7 TP9 TP11-TP15 TP19-TP22 TP24 TP25 TP27 TP29 TP31-TP36 = T POINT A
TP37 TP38 = TEST POINT
U1 U2 = AD7944BCPZ
U3 U10 = SKIROC2
U11 = TLV5618
U12 = ADG741_3: room: MAIN_CH2
U13 = LM6142
U14 = REF3212
U15-U50 = S8650
U51-U54 = TPS7A85
U55 = C11204-01
U56 = LM94021

## Footprints (pads in the part's own frame, mm; a bottom-side part is the same pattern mirrored in y, then rotated)
2MM_HOLE
  round 8.128 hole 3.2: 1(0,0)
154744-ERNI
  rect 2.7x1.199 smd: 1(-0.635,2.41) 2(4.765,2.41) 3(-0.635,-51.94) 4(4.765,-51.94)
  round 1.801 hole 1.6: 5(2,2.21) 6(2,-51.74)
  rect 0.8x0.8 smd: A1(0,0) A2(0,-1.27) A3(0,-2.54) A4(0,-3.81) A5(0,-5.08) A6(0,-6.35) A7(0,-7.62) A8(0,-8.89) A9(0,-10.16) A10(0,-11.43) A11(0,-12.7) A12(0,-13.97) A13(0,-15.24) A14(0,-16.51) A15(0,-17.78) A16(0,-19.05) A17(0,-20.32) A18(0,-21.59) A19(0,-22.86) A20(0,-24.13) A21(0,-25.4) A22(0,-26.67) A23(0,-27.94) A24(0,-29.21) A25(0,-30.48) A26(0,-31.75) A27(0,-33.02) A28(0,-34.29) A29(0,-35.56) A30(0,-36.83) A31(0,-38.1) A32(0,-39.37) A33(0,-40.64) A34(0,-41.91) A35(0,-43.18) A36(0,-44.45) A37(0,-45.72) A38(0,-46.99) A39(0,-48.26) A40(0,-49.53) B1(-1.27,0) B2(-1.27,-1.27) B3(-1.27,-2.54) B4(-1.27,-3.81) B5(-1.27,-5.08) B6(-1.27,-6.35) B7(-1.27,-7.62) B8(-1.27,-8.89) B9(-1.27,-10.16) B10(-1.27,-11.43) B11(-1.27,-12.7) B12(-1.27,-13.97) B13(-1.27,-15.24) B14(-1.27,-16.51) B15(-1.27,-17.78) B16(-1.27,-19.05) B17(-1.27,-20.32) B18(-1.27,-21.59) B19(-1.27,-22.86) B20(-1.27,-24.13) B21(-1.27,-25.4) B22(-1.27,-26.67) B23(-1.27,-27.94) B24(-1.27,-29.21) B25(-1.27,-30.48) B26(-1.27,-31.75) B27(-1.27,-33.02) B28(-1.27,-34.29) B29(-1.27,-35.56) B30(-1.27,-36.83) B31(-1.27,-38.1) B32(-1.27,-39.37) B33(-1.27,-40.64) B34(-1.27,-41.91) B35(-1.27,-43.18) B36(-1.27,-44.45) B37(-1.27,-45.72) B38(-1.27,-46.99) B39(-1.27,-48.26) B40(-1.27,-49.53)
AD7944
  rect 0.701x0.305 smd: 1(-1.892,1.001) 2(-1.892,0.5) 3(-1.892,0) 4(-1.892,-0.5) 5(-1.892,-1.001) 11(1.892,-1.001) 12(1.892,-0.5) 13(1.892,0) 14(1.892,0.5) 15(1.892,1.001)
  rect 0.305x0.701 smd: 6(-1.001,-1.892) 7(-0.5,-1.892) 8(0,-1.892) 9(0.5,-1.892) 10(1.001,-1.892) 16(1.001,1.892) 17(0.5,1.892) 18(0,1.892) 19(-0.5,1.892) 20(-1.001,1.892)
  rect 2.642x2.642 smd: 21(0,0)
C11204_01
  round 0.889 hole 0.635: 1(1.45,2.8) 2(1.45,4.07) 3(1.45,5.34) 4(1.45,6.61) 5(1.45,7.88) 6(1.45,9.15) 7(1.45,10.42) 8(1.45,11.69) 9(1.45,12.96) 10(1.45,14.23) 11(17.95,14.23) 12(17.95,12.96) 13(17.95,11.69) 14(17.95,10.42) 15(17.95,9.15) 16(17.95,7.88)
CHV
  round 1.5 hole 0.9: 1(0,0) 2(6.299,0)
CT1206
  rect 1.651x1.88 smd: 1(-1.631,0) 2(1.631,0)
DBV6
  rect 1.473x0.559 smd: 1(-1.118,0.95) 2(-1.118,0) 3(-1.118,-0.95) 4(1.118,-0.95) 5(1.118,0) 6(1.118,0.95)
GND40
  round 1.524 hole 1.016: 1(0,0)
LM6142_DFP
  rect 0.55x1.6 smd: 1(-1.905,-2.5) 2(-0.635,-2.5) 3(0.635,-2.5) 4(1.905,-2.5) 5(1.902,2.5) 6(0.632,2.5) 7(-0.638,2.5) 8(-1.908,2.5)
MAA05A
  rect 1.168x0.356 smd: 1(-0.978,0.65) 2(-0.978,0) 3(-0.978,-0.65) 4(0.978,-0.65) 5(0.978,0.65)
R0603
  rect 0.813x0.889 smd: 1(-0.762,0) 2(0.762,0)
S5980
  rect 0.6x2 smd: 1(6.94,9.85) 2(5.67,9.85) 4(3.13,9.85) 5(1.86,9.85) 6(1.86,0.75) 7(3.13,0.75) 8(4.4,0.75) 9(5.67,0.75) 10(6.94,0.75)
  rect 0.6x3 smd: 3(4.4,9.35)
S8650
  round 0.762 hole 0.6: 1(0,-2.5) 2(0,2.5)
SC0603
  rect 0.813x0.889 smd: 1(-0.762,0) 2(0.762,0)
SC0805
  rect 1x1.25 smd: 1(-1,0) 2(1,0)
SD0805
  rect 1.016x1.27 smd: 1(-1.143,0) 2(1.143,0)
SIP-4P-156
  rect 2.794x2.794 hole 1.778: 1(-5.944,0)
  round 2.794 hole 1.778: 2(-1.981,0) 3(1.981,0) 4(5.944,0)
SKIROC2
  rect 2.032x0.25 smd: 1(-16.65,14.75) 2(-16.65,14.25) 3(-16.65,13.75) 4(-16.65,13.25) 5(-16.65,12.75) 6(-16.65,12.25) 7(-16.65,11.75) 8(-16.65,11.25) 9(-16.65,10.75) 10(-16.65,10.25) 11(-16.65,9.75) 12(-16.65,9.25) 13(-16.65,8.75) 14(-16.65,8.25) 15(-16.65,7.75) 16(-16.65,7.25) 17(-16.65,6.75) 18(-16.65,6.25) 19(-16.65,5.75) 20(-16.65,5.25) 21(-16.65,4.75) 22(-16.65,4.25) 23(-16.65,3.75) 24(-16.65,3.25) 25(-16.65,2.75) 26(-16.65,2.25) 27(-16.65,1.75) 28(-16.65,1.25) 29(-16.65,0.75) 30(-16.65,0.25) 31(-16.65,-0.25) 32(-16.65,-0.75) 33(-16.65,-1.25) 34(-16.65,-1.75) 35(-16.65,-2.25) 36(-16.65,-2.75) 37(-16.65,-3.25) 38(-16.65,-3.75) 39(-16.65,-4.25) 40(-16.65,-4.75) 41(-16.65,-5.25) 42(-16.65,-5.75) 43(-16.65,-6.25) 44(-16.65,-6.75) 45(-16.65,-7.25) 46(-16.65,-7.75) 47(-16.65,-8.25) 48(-16.65,-8.75) 49(-16.65,-9.25) 50(-16.65,-9.75) 51(-16.65,-10.25) 52(-16.65,-10.75) 53(-16.65,-11.25) 54(-16.65,-11.75) 55(-16.65,-12.25) 56(-16.65,-12.75) 57(-16.65,-13.25) 58(-16.65,-13.75) 59(-16.65,-14.25) 60(-16.65,-14.75) 121(16.65,-14.75) 122(16.65,-14.25) 123(16.65,-13.75) 124(16.65,-13.25) 125(16.65,-12.75) 126(16.65,-12.25) 127(16.65,-11.75) 128(16.65,-11.25) 129(16.65,-10.75) 130(16.65,-10.25) 131(16.65,-9.75) 132(16.65,-9.25) 133(16.65,-8.75) 134(16.65,-8.25) 135(16.65,-7.75) 136(16.65,-7.25) 137(16.65,-6.75) 138(16.65,-6.25) 139(16.65,-5.75) 140(16.65,-5.25) 141(16.65,-4.75) 142(16.65,-4.25) 143(16.65,-3.75) 144(16.65,-3.25) 145(16.65,-2.75) 146(16.65,-2.25) 147(16.65,-1.75) 148(16.65,-1.25) 149(16.65,-0.75) 150(16.65,-0.25) 151(16.65,0.25) 152(16.65,0.75) 153(16.65,1.25) 154(16.65,1.75) 155(16.65,2.25) 156(16.65,2.75) 157(16.65,3.25) 158(16.65,3.75) 159(16.65,4.25) 160(16.65,4.75) 161(16.65,5.25) 162(16.65,5.75) 163(16.65,6.25) 164(16.65,6.75) 165(16.65,7.25) 166(16.65,7.75) 167(16.65,8.25) 168(16.65,8.75) 169(16.65,9.25) 170(16.65,9.75) 171(16.65,10.25) 172(16.65,10.75) 173(16.65,11.25) 174(16.65,11.75) 175(16.65,12.25) 176(16.65,12.75) 177(16.65,13.25) 178(16.65,13.75) 179(16.65,14.25) 180(16.65,14.75)
  rect 0.25x2.032 smd: 61(-14.75,-16.65) 62(-14.25,-16.65) 63(-13.75,-16.65) 64(-13.25,-16.65) 65(-12.75,-16.65) 66(-12.25,-16.65) 67(-11.75,-16.65) 68(-11.25,-16.65) 69(-10.75,-16.65) 70(-10.25,-16.65) 71(-9.75,-16.65) 72(-9.25,-16.65) 73(-8.75,-16.65) 74(-8.25,-16.65) 75(-7.75,-16.65) 76(-7.25,-16.65) 77(-6.75,-16.65) 78(-6.25,-16.65) 79(-5.75,-16.65) 80(-5.25,-16.65) 81(-4.75,-16.65) 82(-4.25,-16.65) 83(-3.75,-16.65) 84(-3.25,-16.65) 85(-2.75,-16.65) 86(-2.25,-16.65) 87(-1.75,-16.65) 88(-1.25,-16.65) 89(-0.75,-16.65) 90(-0.25,-16.65) 91(0.25,-16.65) 92(0.75,-16.65) 93(1.25,-16.65) 94(1.75,-16.65) 95(2.25,-16.65) 96(2.75,-16.65) 97(3.25,-16.65) 98(3.75,-16.65) 99(4.25,-16.65) 100(4.75,-16.65) 101(5.25,-16.65) 102(5.75,-16.65) 103(6.25,-16.65) 104(6.75,-16.65) 105(7.25,-16.65) 106(7.75,-16.65) 107(8.25,-16.65) 108(8.75,-16.65) 109(9.25,-16.65) 110(9.75,-16.65) 111(10.25,-16.65) 112(10.75,-16.65) 113(11.25,-16.65) 114(11.75,-16.65) 115(12.25,-16.65) 116(12.75,-16.65) 117(13.25,-16.65) 118(13.75,-16.65) 119(14.25,-16.65) 120(14.75,-16.65) 181(14.75,16.65) 182(14.25,16.65) 183(13.75,16.65) 184(13.25,16.65) 185(12.75,16.65) 186(12.25,16.65) 187(11.75,16.65) 188(11.25,16.65) 189(10.75,16.65) 190(10.25,16.65) 191(9.75,16.65) 192(9.25,16.65) 193(8.75,16.65) 194(8.25,16.65) 195(7.75,16.65) 196(7.25,16.65) 197(6.75,16.65) 198(6.25,16.65) 199(5.75,16.65) 200(5.25,16.65) 201(4.75,16.65) 202(4.25,16.65) 203(3.75,16.65) 204(3.25,16.65) 205(2.75,16.65) 206(2.25,16.65) 207(1.75,16.65) 208(1.25,16.65) 209(0.75,16.65) 210(0.25,16.65) 211(-0.25,16.65) 212(-0.75,16.65) 213(-1.25,16.65) 214(-1.75,16.65) 215(-2.25,16.65) 216(-2.75,16.65) 217(-3.25,16.65) 218(-3.75,16.65) 219(-4.25,16.65) 220(-4.75,16.65) 221(-5.25,16.65) 222(-5.75,16.65) 223(-6.25,16.65) 224(-6.75,16.65) 225(-7.25,16.65) 226(-7.75,16.65) 227(-8.25,16.65) 228(-8.75,16.65) 229(-9.25,16.65) 230(-9.75,16.65) 231(-10.25,16.65) 232(-10.75,16.65) 233(-11.25,16.65) 234(-11.75,16.65) 235(-12.25,16.65) 236(-12.75,16.65) 237(-13.25,16.65) 238(-13.75,16.65) 239(-14.25,16.65) 240(-14.75,16.65)
SMA_PLATED
  rect 1.524x1.524 smd: 1(0,0)
  rect 1.905x1.905 smd: 2(2.375,2.375) 3(2.375,-2.375) 4(-2.375,-2.375) 5(-2.375,2.375)
SOT65P210X110-5N
  oval 1.041x0.457 smd: 1(-0.94,0.66) 2(-0.94,0) 3(-0.94,-0.66) 4(0.94,-0.66) 5(0.94,0.66)
SR0603
  rect 0.762x0.813 smd: 1(-0.762,0) 2(0.762,0)
STC7343
  rect 3.302x2.413 smd: 1(-3.175,0) 2(3.175,0)
TLV5618_D_DFP
  rect 0.55x1.6 smd: 1(-1.905,-2.7) 2(-0.635,-2.7) 3(0.635,-2.7) 4(1.905,-2.7) 5(1.905,2.7) 6(0.635,2.7) 7(-0.635,2.7) 8(-1.905,2.7)
TP-40-SMD
  round 1.016 smd: 1(0,0)
TPS7A85
  oval 0.813x0.254 smd: 1(-1.75,1) 2(-1.75,0.5) 3(-1.75,0) 4(-1.75,-0.5) 5(-1.75,-1) 11(1.75,-1) 12(1.75,-0.5) 13(1.75,0) 14(1.75,0.5) 15(1.75,1)
  oval 0.254x0.813 smd: 6(-1,-1.75) 7(-0.5,-1.75) 8(0,-1.75) 9(0.5,-1.75) 10(1,-1.75) 16(1,1.75) 17(0.5,1.75) 18(0,1.75) 19(-0.5,1.75) 20(-1,1.75)
  rect 2.057x2.057 smd: 21(0,0)
XAL4020
  rect 1.4x3.7 smd: 1(-1.4,0) 2(1.4,0)

## Nets
3.3V_A: C42.2 C43.2 C44.2 C45.2 C46.2 C47.2 C48.2 C49.2 C50.2 C51.2 C52.2 C53.2 C54.2 C92.2 C93.2 C94.2 C95.2 C96.2 C97.2 C98.2 C99.2 C100.2 C101.2 C102.2 C103.2 C104.2 C196.1 C197.1 C198.1 C202.1 R123.1 R126.1 U3.73(VDD_BG) U3.79(VDD_DAC) U3.91(VDD_TDC) U3.103(VDD_4BIT) U3.105(VDD_ADC) U3.115(VDD_DISCADC) U3.190(VDD_GS) U3.196(VDD_TRIGGER) U3.204(VDD_SCA) U3.213(VDD_FS) U3.217(VDD_AMP10) U3.223(VDD_SS10) U3.227(VDD_SS1) U10.73(VDD_BG) U10.79(VDD_DAC) U10.91(VDD_TDC) U10.103(VDD_4BIT) U10.105(VDD_ADC) U10.115(VDD_DISCADC) U10.190(VDD_GS) U10.196(VDD_TRIGGER) U10.204(VDD_SCA) U10.213(VDD_FS) U10.217(VDD_AMP10) U10.223(VDD_SS10) U10.227(VDD_SS1) U52.1(OUT#1) U52.19(OUT#19) U52.20(OUT#20)
3.3V_D: C23.2 C24.2 C25.2 C27.2 C28.2 C29.2 C30.2 C31.2 C73.2 C74.2 C75.2 C76.2 C77.2 C78.2 C79.2 C80.2 C113.2 C208.1 C209.1 C212.1 C218.1 R141.1 R144.1 U3.109(VDDD_DELAY) U3.125(VDDD_TDC) U3.126(VDDD#126) U3.128(VDDD#128) U3.153(VDDD#153) U3.173(VDD) U3.184(VDD_SC) U3.205(VDDD_SCA) U10.109(VDDD_DELAY) U10.125(VDDD_TDC) U10.126(VDDD#126) U10.128(VDDD#128) U10.153(VDDD#153) U10.173(VDD) U10.184(VDD_SC) U10.205(VDDD_SCA) U11.8(VDD) U12.5(VDD) U13.8(V+) U53.1(OUT#1) U53.19(OUT#19) U53.20(OUT#20)
3.3V_PA: C34.2 C35.2 C36.2 C37.2 C38.2 C39.2 C40.2 C41.2 C55.2 C56.2 C57.2 C58.2 C59.2 C60.2 C61.2 C62.2 C84.2 C85.2 C86.2 C87.2 C88.2 C89.2 C90.2 C91.2 C105.2 C106.2 C107.2 C108.2 C109.2 C110.2 C111.2 C112.2 C192.1 C193.1 C194.1 C200.1 R122.1 R124.1 U3.1(VDDA_PA#1) U3.3(VDDA_PA#3) U3.30(VDDA_PA#30) U3.58(VDDA_PA#58) U3.60(VDDA_PA#60) U3.67(VDDA_PA#67) U3.229(VDD_PA) U3.234(VDDA_PA#234) U10.1(VDDA_PA#1) U10.3(VDDA_PA#3) U10.30(VDDA_PA#30) U10.58(VDDA_PA#58) U10.60(VDDA_PA#60) U10.67(VDDA_PA#67) U10.229(VDD_PA) U10.234(VDDA_PA#234) U51.1(OUT#1) U51.19(OUT#19) U51.20(OUT#20)
+1.25V_REF: C116.1 C118.1 C119.1 R47.1 U11.6(REF) U14.5(OUT1) U14.6(OUT2)
+2.5V_A: C1.2 C2.2 C3.2 C7.2 C8.2 C9.2 C210.1 C211.1 C214.1 C216.1 R13.2 R14.2 R16.2 R18.2 R19.2 R22.2 R32.2 R34.2 R36.2 R38.2 R40.2 R42.2 R140.1 R142.1 U1.8(VIO) U1.11(DVDD) U1.15(TURBO) U1.16(AVDD) U2.8(VIO) U2.11(DVDD) U2.15(TURBO) U2.16(AVDD) U14.3(EN) U14.4(IN) U54.1(OUT#1) U54.19(OUT#19) U54.20(OUT#20)
+5V: C4.2 C10.2 C195.1 C205.1 C206.1 C207.1 C213.1 C222.2 L1.2 R162.1 R163.1 R165.1 R173.2 R174.2 TP37.1 U1.19(BVDD) U2.19(BVDD) U51.14(EN) U51.15(IN#15) U51.16(IN#16) U51.17(IN#17) U52.14(EN) U52.15(IN#15) U52.16(IN#16) U52.17(IN#17) U53.14(EN) U53.15(IN#15) U53.16(IN#16) U53.17(IN#17) U54.14(EN) U54.15(IN#15) U54.16(IN#16) U54.17(IN#17) U55.1(VCC)
+5VIN: C204.1 L1.1 R121.1 R172.2 R205.2 R206.2 R207.2
GND: C1.1 C2.1 C3.1 C4.1 C5.2 C6.2 C7.1 C8.1 C9.1 C10.1 C11.2 C12.2 C13.1 C14.1 C15.1 C16.1 C17.1 C18.1 C19.1 C20.1 C21.1 C22.1 C23.1 C24.1 C25.1 C26.1 C27.1 C28.1 C29.1 C30.1 C31.1 C32.1 C33.1 C34.1 C35.1 C36.1 C37.1 C38.1 C39.1 C40.1 C41.1 C42.1 C43.1 C44.1 C45.1 C46.1 C47.1 C48.1 C49.1 C50.1 C51.1 C52.1 C53.1 C54.1 C55.1 C56.1 C57.1 C58.1 C59.1 C60.1 C61.1 C62.1 C63.1 C64.1 C65.1 C66.1 C67.1 C68.1 C69.1 C70.1 C71.1 C72.1 C73.1 C74.1 C75.1 C76.1 C77.1 C78.1 C79.1 C80.1 C81.1 C82.1 C83.1 C84.1 C85.1 C86.1 C87.1 C88.1 C89.1 C90.1 C91.1 C92.1 C93.1 C94.1 C95.1 C96.1 C97.1 C98.1 C99.1 C100.1 C101.1 C102.1 C103.1 C104.1 C105.1 C106.1 C107.1 C108.1 C109.1 C110.1 C111.1 C112.1 C113.1 C114.1 C118.2 C119.2 C192.2 C193.2 C194.2 C195.2 C196.2 C197.2 C198.2 C201.2 C203.2 C204.2 C205.2 C206.2 C207.2 C208.2 C209.2 C210.2 C211.2 C212.2 C213.2 C214.2 C217.2 C219.2 C220.2 C221.2 C222.1 C223.2 C224.2 C225.2 C226.2 C255.2 C256.2 C257.2 C258.2 C259.2 C260.2 D37.2(CATHODE) J1.2 J1.3 J1.4 J1.5 J2.2 J2.3 J2.4 J2.5 J3.2 J3.3 J3.4 J3.5 J4.2 J4.3 J4.4 J4.5 J5.2 J5.3 J5.4 J5.5 J6.2 J6.3 J6.4 J6.5 J7.2 J7.3 J7.4 J7.5 J8.2 J8.3 J8.4 J8.5 J9.2 J9.3 J9.4 J9.5 J10.1(GND#1) J10.2(GND#2) J10.3(GND#3) J10.4(GND#4) J10.5(GND#5) J10.6(GND#6) J10.A1 J10.A3 J10.A5 J10.A7 J10.A9 J10.A11 J10.A13 J10.A16 J10.A19 J10.A21 J10.A23 J10.A25 J10.A27 J10.A29 J10.A31 J10.A32 J10.A35 J10.A36 J10.A39 J10.A40 J10.B2 J10.B4 J10.B6 J10.B8 J10.B10 J10.B12 J10.B13 J10.B14 J10.B17 J10.B18 J10.B20 J10.B22 J10.B24 J10.B26 J10.B28 J10.B30 J10.B33 J10.B34 J10.B37 J10.B38 J11.1 J11.4 J12.1(GND#1) J12.2(GND#2) J12.3(GND#3) J12.4(GND#4) J12.5(GND#5) J12.6(GND#6) J12.A1 J12.A3 J12.A5 J12.A7 J12.A9 J12.A11 J12.A13 J12.A15 J12.A17 J12.A19 J12.A21 J12.A23 J12.A25 J12.A27 J12.A29 J12.A31 J12.A33 J12.A35 J12.A37 J12.A39 J12.B2 J12.B4 J12.B6 J12.B8 J12.B10 J12.B12 J12.B14 J12.B16 J12.B18 J12.B20 J12.B22 J12.B24 J12.B26 J12.B28 J12.B30 J12.B32 J12.B34 J12.B36 J12.B38 J12.B40 J13.2 J13.3 J13.4 J13.5 J14.1(GND) J15.1(GND) J16.1(GND) J17.1(GND) J18.1(GND) J19.1(GND) R1.2 R3.2 R6.2 R8.2 R11.2 R12.2 R24.2 R27.2 R30.2 R31.2 R44.2 R48.1 R49.1 R50.1 R51.1 R52.1 R53.1 R54.1 R55.1 R56.1 R57.1 R58.1 R59.1 R60.1 R61.1 R62.1 R63.1 R64.1 R65.1 R66.1 R67.1 R68.1 R69.1 R70.1 R71.1 R72.1 R73.1 R74.1 R75.1 R76.1 R77.1 R78.1 R79.1 R80.1 R81.1 R82.1 R83.1 R84.1 R85.1 R86.1 R87.1 R88.1 R89.1 R90.1 R91.1 R92.1 R93.1 R94.1 R95.1 R96.1 R97.1 R98.1 R99.1 R100.1 R101.1 R102.1 R103.1 R104.1 R105.1 R106.1 R107.1 R108.1 R109.1 R110.1 R111.1 R112.1 R113.1 R114.1 R115.1 R116.1 R117.1 R118.1 R119.1 R125.2 R127.2 R128.2 R129.2 R130.2 R131.2 R132.2 R133.2 R134.2 R135.2 R136.2 R137.2 R138.2 R139.2 R143.2 R145.2 R146.2 R147.2 R148.2 R149.2 R150.2 R151.2 R152.2 R153.2 R154.2 R155.2 R156.2 R157.2 R167.2 R171.2 R175.1 R176.1 R177.1 R178.1 R179.1 R180.1 R181.1 R182.1 R183.1 R184.1 R185.1 R186.1 R187.1 R188.1 R189.1 R190.1 R191.1 R192.1 R193.1 R194.1 R195.1 R196.1 R197.1 R198.1 R199.1 R200.1 R201.1 R202.1 U1.3(REGGND) U1.4(REGGND_1) U1.5(IN-) U1.10(DGND) U1.17(AGND) U1.18(AGND_1) U1.21(EP) U2.3(REGGND) U2.4(REGGND_1) U2.5(IN-) U2.10(DGND) U2.17(AGND) U2.18(AGND_1) U2.21(EP) U3.2(VSSI#2) U3.31(VSSI#31) U3.59(VSSI#59) U3.68(VSSA#68) U3.71(GND_PA#71) U3.75(GND_BG) U3.85(GND_DAC) U3.89(GND_TDC) U3.99(VSSA#99) U3.100(VSSM#100) U3.101(GND_4BIT) U3.107(GND_ADC) U3.111(GNDD_DELAY) U3.113(VSSM#113) U3.117(GND_DISCADC) U3.122(VSSM#122) U3.123(VSSD#123) U3.124(GNDD_TDC) U3.127(VSSD#127) U3.130(GNDD_TEST) U3.131(RTN#131) U3.137(RTN#137) U3.151(VSSD) U3.152(GNDD) U3.174(VSSD#174) U3.178(VSSD#178) U3.182(GND_SC) U3.186(VSSM#186) U3.192(GND_GS) U3.194(GND_TRIGGER) U3.200(GND_TEST) U3.201(VSSM#201) U3.202(VSSA#202) U3.206(GNDD_SCA) U3.207(GND_SCA) U3.209(GND_CAPA_SCA_T) U3.211(GND_CAPA_SCA) U3.215(GND_FS) U3.219(GND_AMP10) U3.221(GND_SS10) U3.225(GND_SS1) U3.231(GND_PA#231) U3.233(VSSA#233) U10.2(VSSI#2) U10.31(VSSI#31) U10.59(VSSI#59) U10.68(VSSA#68) U10.71(GND_PA#71) U10.75(GND_BG) U10.85(GND_DAC) U10.89(GND_TDC) U10.99(VSSA#99) U10.100(VSSM#100) U10.101(GND_4BIT) U10.107(GND_ADC) U10.111(GNDD_DELAY) U10.113(VSSM#113) U10.117(GND_DISCADC) U10.122(VSSM#122) U10.123(VSSD#123) U10.124(GNDD_TDC) U10.127(VSSD#127) U10.130(GNDD_TEST) U10.131(RTN#131) U10.137(RTN#137) U10.151(VSSD) U10.152(GNDD) U10.174(VSSD#174) U10.178(VSSD#178) U10.182(GND_SC) U10.186(VSSM#186) U10.192(GND_GS) U10.194(GND_TRIGGER) U10.200(GND_TEST) U10.201(VSSM#201) U10.202(VSSA#202) U10.206(GNDD_SCA) U10.207(GND_SCA) U10.209(GND_CAPA_SCA_T) U10.211(GND_CAPA_SCA) U10.215(GND_FS) U10.219(GND_AMP10) U10.221(GND_SS10) U10.225(GND_SS1) U10.231(GND_PA#231) U10.233(VSSA#233) U11.5(AGND) U12.3(GND) U13.4(V-) U14.1(GND1) U14.2(GND2) U51.8(GND#8) U51.18(GND#18) U51.21(THERMALPAD) U52.8(GND#8) U52.18(GND#18) U52.21(THERMALPAD) U53.8(GND#8) U53.18(GND#18) U53.21(THERMALPAD) U54.8(GND#8) U54.18(GND#18) U54.21(THERMALPAD) U55.2(GND#2) U55.5(GND#5) U55.8(GND#8) U55.15(GND#15) U56.1(GS0) U56.2(GND) U56.5(GS1)
VDD_TEST: U3.203(VDD_TEST)
A_PROBE_SKIROC1: R9.2 U3.179(A_PROBE)
A_PROBE_SKIROC_2: R28.2 U10.179(A_PROBE)
C_TEST_IN: R5.2 U3.69(C_TEST/IN_CALI_1) U3.70(C_TEST/IN_CALI_2)
CALI_VOL: C116.2 R45.1 U12.1(IN)
DACOUTA: C114.2 R43.2 U13.3(+INA)
HV_30V: C258.1 C259.1 C260.1 D1.3(CATHODE COMMON) D2.3(CATHODE COMMON) D3.3(CATHODE COMMON) D4.3(CATHODE COMMON) D7.3(CATHODE COMMON) D8.3(CATHODE COMMON) D9.3(CATHODE COMMON) D10.3(CATHODE COMMON) D13.3(CATHODE COMMON) D14.3(CATHODE COMMON) D15.3(CATHODE COMMON) D16.3(CATHODE COMMON) D17.3(CATHODE COMMON) D18.3(CATHODE COMMON) D19.3(CATHODE COMMON) D20.3(CATHODE COMMON) R158.2 TP38.1
HV_30V_IN: C220.1 C221.1 R120.2 R158.1
HV_SIPIN: C255.1 C256.1 C257.1 R160.2 U15.2(ANODE) U16.2(ANODE) U17.2(ANODE) U18.2(ANODE) U19.2(ANODE) U20.2(ANODE) U21.2(ANODE) U22.2(ANODE) U23.2(ANODE) U24.2(ANODE) U25.2(ANODE) U26.2(ANODE) U27.2(ANODE) U28.2(ANODE) U29.2(ANODE) U30.2(ANODE) U31.2(ANODE) U32.2(ANODE) U33.2(ANODE) U34.2(ANODE) U35.2(ANODE) U36.2(ANODE) U37.2(ANODE) U38.2(ANODE) U39.2(ANODE) U40.2(ANODE) U41.2(ANODE) U42.2(ANODE) U43.2(ANODE) U44.2(ANODE) U45.2(ANODE) U46.2(ANODE) U47.2(ANODE) U48.2(ANODE) U49.2(ANODE) U50.2(ANODE)
IBI_PA_SKIROC1: C33.2 U3.228(IBI_PA)
IBI_PA_SKIROC_2: C83.2 U10.228(IBI_PA)
IN_ADC_EXT_SKIROC1: R10.2 U3.183(IN_ADC_EXT)
IN_ADC_EXT_SKIROC_2: R29.2 U10.183(IN_ADC_EXT)
OUTPUT_TO_DIF: C225.1 R161.1 R164.1
SK1_CHN0: C120.1 D1.10(ANODE A) R48.2
SK1_CHN1: C123.1 D1.1(ANODE B) R51.2
SK1_CHN2: C126.1 D1.5(ANODE C) R54.2
SK1_CHN3: C129.1 D1.6(ANODE D) R57.2
SK1_CHN4: C132.1 D2.10(ANODE A) R60.2
SK1_CHN5: C135.1 D2.1(ANODE B) R63.2
SK1_CHN6: C138.1 D2.5(ANODE C) R66.2
SK1_CHN7: C141.1 D2.6(ANODE D) R69.2
SK1_CHN8: C144.1 D3.10(ANODE A) R72.2
SK1_CHN9: C147.1 D3.1(ANODE B) R75.2
SK1_CHN10: C150.1 D3.5(ANODE C) R78.2
SK1_CHN11: C153.1 D3.6(ANODE D) R81.2
SK1_CHN12: C121.1 D4.10(ANODE A) R49.2
SK1_CHN13: C124.1 D4.1(ANODE B) R52.2
SK1_CHN14: C127.1 D4.5(ANODE C) R55.2
SK1_CHN15: C130.1 D4.6(ANODE D) R58.2
SK1_CHN16: C133.1 D7.10(ANODE A) R61.2
SK1_CHN17: C136.1 D7.1(ANODE B) R64.2
SK1_CHN18: C139.1 D7.5(ANODE C) R67.2
SK1_CHN19: C142.1 D7.6(ANODE D) R70.2
SK1_CHN20: C145.1 D8.10(ANODE A) R73.2
SK1_CHN21: C148.1 D8.1(ANODE B) R76.2
SK1_CHN22: C151.1 D8.5(ANODE C) R79.2
SK1_CHN23: C154.1 D8.6(ANODE D) R82.2
SK1_CHN24: C122.1 D9.10(ANODE A) R50.2
SK1_CHN25: C125.1 D9.1(ANODE B) R53.2
SK1_CHN26: C128.1 D9.5(ANODE C) R56.2
SK1_CHN27: C131.1 D9.6(ANODE D) R59.2
SK1_CHN28: C134.1 D10.10(ANODE A) R62.2
SK1_CHN29: C137.1 D10.1(ANODE B) R65.2
SK1_CHN30: C140.1 D10.5(ANODE C) R68.2
SK1_CHN31: C143.1 D10.6(ANODE D) R71.2
SK1_CHN32: C146.1 D13.10(ANODE A) R74.2
SK1_CHN33: C149.1 D13.1(ANODE B) R77.2
SK1_CHN34: C152.1 D13.5(ANODE C) R80.2
SK1_CHN35: C155.1 D13.6(ANODE D) R83.2
SK1_CHN36: C227.1 D14.10(ANODE A) R175.2
SK1_CHN37: C228.1 D14.1(ANODE B) R176.2
SK1_CHN38: C229.1 D14.5(ANODE C) R177.2
SK1_CHN39: C230.1 D14.6(ANODE D) R178.2
SK1_CHN40: C231.1 D15.10(ANODE A) R179.2
SK1_CHN41: C232.1 D15.1(ANODE B) R180.2
SK1_CHN42: C233.1 D15.5(ANODE C) R181.2
SK1_CHN43: C234.1 D15.6(ANODE D) R182.2
SK1_CHN44: C235.1 D16.10(ANODE A) R183.2
SK1_CHN45: C236.1 D16.1(ANODE B) R184.2
SK1_CHN46: C237.1 D16.5(ANODE C) R185.2
SK1_CHN47: C238.1 D16.6(ANODE D) R186.2
SK1_CHN48: C239.1 D17.10(ANODE A) R187.2
SK1_CHN49: C240.1 D17.1(ANODE B) R188.2
SK1_CHN50: C241.1 D17.5(ANODE C) R189.2
SK1_CHN51: C242.1 D17.6(ANODE D) R190.2
SK1_CHN52: C243.1 D18.10(ANODE A) R191.2
SK1_CHN53: C244.1 D18.1(ANODE B) R192.2
SK1_CHN54: C245.1 D18.5(ANODE C) R193.2
SK1_CHN55: C246.1 D18.6(ANODE D) R194.2
SK1_CHN56: C247.1 D19.10(ANODE A) R195.2
SK1_CHN57: C248.1 D19.1(ANODE B) R196.2
SK1_CHN58: C249.1 D19.5(ANODE C) R197.2
SK1_CHN59: C250.1 D19.6(ANODE D) R198.2
SK1_CHN60: C251.1 D20.10(ANODE A) R199.2
SK1_CHN61: C252.1 D20.1(ANODE B) R200.2
SK1_CHN62: C253.1 D20.5(ANODE C) R201.2
SK1_CHN63: C254.1 D20.6(ANODE D) R202.2
SK1_CHN_OUT63: C254.2
SK1_INPUT1: C120.2 U3.240(IN_5)
SK1_INPUT2: C123.2 U3.238(IN_3)
SK1_INPUT3: C126.2 U3.236(IN_1)
SK1_INPUT4: C129.2 U3.239(IN_4)
SK1_INPUT5: C132.2 U3.237(IN_2)
SK1_INPUT6: C135.2 U3.235(IN_0)
SK1_INPUT7: C138.2 U3.9(IN_11)
SK1_INPUT8: C141.2 U3.4(IN_6)
SK1_INPUT9: C144.2 U3.12(IN_14)
SK1_INPUT10: C147.2 U3.10(IN_12)
SK1_INPUT11: C150.2 U3.11(IN_13)
SK1_INPUT12: C153.2 U3.16(IN_18)
SK1_INPUT13: C121.2 U3.17(IN_19)
SK1_INPUT14: C124.2 U3.13(IN_15)
SK1_INPUT15: C127.2 U3.19(IN_21)
SK1_INPUT16: C130.2 U3.20(IN_22)
SK1_INPUT17: C133.2 U3.8(IN_10)
SK1_INPUT18: C136.2 U3.6(IN_8)
SK1_INPUT19: C139.2 U3.5(IN_7)
SK1_INPUT20: C142.2 U3.15(IN_17)
SK1_INPUT21: C145.2 U3.23(IN_25)
SK1_INPUT22: C148.2 U3.7(IN_9)
SK1_INPUT23: C151.2 U3.14(IN_16)
SK1_INPUT24: C154.2 U3.18(IN_20)
SK1_INPUT25: C122.2 U3.24(IN_26)
SK1_INPUT26: C125.2 U3.22(IN_24)
SK1_INPUT27: C128.2 U3.25(IN_27)
SK1_INPUT28: C131.2 U3.29(IN_31)
SK1_INPUT29: C134.2 U3.27(IN_29)
SK1_INPUT30: C137.2 U3.21(IN_23)
SK1_INPUT31: C140.2 U3.26(IN_28)
SK1_INPUT32: C143.2 U3.28(IN_30)
SK1_INPUT33: C146.2 U3.48(IN_48)
SK1_INPUT34: C149.2 U3.34(IN_34)
SK1_INPUT35: C152.2 U3.33(IN_33)
SK1_INPUT36: C155.2 U3.49(IN_49)
SK1_INPUT37: C227.2 U3.51(IN_51)
SK1_INPUT38: C228.2 U3.32(IN_32)
SK1_INPUT39: C229.2 U3.45(IN_45)
SK1_INPUT40: C230.2 U3.50(IN_50)
SK1_INPUT41: C231.2 U3.39(IN_39)
SK1_INPUT42: C232.2 U3.35(IN_35)
SK1_INPUT43: C233.2 U3.36(IN_36)
SK1_INPUT44: C234.2 U3.40(IN_40)
SK1_INPUT45: C235.2 U3.41(IN_41)
SK1_INPUT46: C236.2 U3.37(IN_37)
SK1_INPUT47: C237.2 U3.38(IN_38)
SK1_INPUT48: C238.2 U3.42(IN_42)
SK1_INPUT49: C239.2 U3.54(IN_54)
SK1_INPUT50: C240.2 U3.52(IN_52)
SK1_INPUT51: C241.2 U3.53(IN_53)
SK1_INPUT52: C242.2 U3.47(IN_47)
SK1_INPUT53: C243.2 U3.55(IN_55)
SK1_INPUT54: C244.2 U3.56(IN_56)
SK1_INPUT55: C245.2 U3.46(IN_46)
SK1_INPUT56: C246.2 U3.57(IN_57)
SK1_INPUT57: C247.2 U3.61(IN_58)
SK1_INPUT58: C248.2 U3.65(IN_62)
SK1_INPUT59: C249.2 U3.44(IN_44)
SK1_INPUT60: C250.2 U3.62(IN_59)
SK1_INPUT61: C251.2 U3.43(IN_43)
SK1_INPUT62: C252.2 U3.63(IN_60)
SK1_INPUT63: C253.2 U3.64(IN_61)
SK1_INPUT_CHN64: R25.2 U3.66(IN_63)
SK1_V_BG: U3.77(V_BG)
SK1_VTH0: TP4.1(TP) U3.104(VTH0)
SK1_VTH1: TP6.1(TP) U3.112(VTH1)
SK2_CHN0: C156.1 R84.2 U15.1(CATHODE)
SK2_CHN1: C159.1 R87.2 U16.1(CATHODE)
SK2_CHN2: C162.1 R90.2 U17.1(CATHODE)
SK2_CHN3: C165.1 R93.2 U18.1(CATHODE)
SK2_CHN4: C168.1 R96.2 U19.1(CATHODE)
SK2_CHN5: C171.1 R99.2 U20.1(CATHODE)
SK2_CHN6: C174.1 R102.2 U21.1(CATHODE)
SK2_CHN7: C177.1 R105.2 U22.1(CATHODE)
SK2_CHN8: C180.1 R108.2 U23.1(CATHODE)
SK2_CHN9: C183.1 R111.2 U24.1(CATHODE)
SK2_CHN10: C186.1 R114.2 U25.1(CATHODE)
SK2_CHN11: C189.1 R117.2 U26.1(CATHODE)
SK2_CHN12: C157.1 R85.2 U27.1(CATHODE)
SK2_CHN13: C160.1 R88.2 U28.1(CATHODE)
SK2_CHN14: C163.1 R91.2 U29.1(CATHODE)
SK2_CHN15: C166.1 R94.2 U30.1(CATHODE)
SK2_CHN16: C169.1 R97.2 U31.1(CATHODE)
SK2_CHN17: C172.1 R100.2 U32.1(CATHODE)
SK2_CHN18: C175.1 R103.2 U33.1(CATHODE)
SK2_CHN19: C178.1 R106.2 U34.1(CATHODE)
SK2_CHN20: C181.1 R109.2 U35.1(CATHODE)
SK2_CHN21: C184.1 R112.2 U36.1(CATHODE)
SK2_CHN22: C187.1 R115.2 U37.1(CATHODE)
SK2_CHN23: C190.1 R118.2 U38.1(CATHODE)
SK2_CHN24: C158.1 R86.2 U39.1(CATHODE)
SK2_CHN25: C161.1 R89.2 U40.1(CATHODE)
SK2_CHN26: C164.1 R92.2 U41.1(CATHODE)
SK2_CHN27: C167.1 R95.2 U42.1(CATHODE)
SK2_CHN28: C170.1 R98.2 U43.1(CATHODE)
SK2_CHN29: C173.1 R101.2 U44.1(CATHODE)
SK2_CHN30: C176.1 R104.2 U45.1(CATHODE)
SK2_CHN31: C179.1 R107.2 U46.1(CATHODE)
SK2_CHN32: C182.1 R110.2 U47.1(CATHODE)
SK2_CHN33: C185.1 R113.2 U48.1(CATHODE)
SK2_CHN34: C188.1 R116.2 U49.1(CATHODE)
SK2_CHN35: C191.1 R119.2 U50.1(CATHODE)
SK2_INPUT1: C156.2 U10.235(IN_0)
SK2_INPUT2: C159.2 U10.236(IN_1)
SK2_INPUT3: C162.2 U10.238(IN_3)
SK2_INPUT4: C165.2 U10.239(IN_4)
SK2_INPUT5: C168.2 U10.5(IN_7)
SK2_INPUT6: C171.2 U10.4(IN_6)
SK2_INPUT7: C174.2 U10.10(IN_12)
SK2_INPUT8: C177.2 U10.8(IN_10)
SK2_INPUT9: C180.2 U10.237(IN_2)
SK2_INPUT10: C183.2 U10.240(IN_5)
SK2_INPUT11: C186.2 U10.6(IN_8)
SK2_INPUT12: C189.2 U10.7(IN_9)
SK2_INPUT13: C157.2 U10.14(IN_16)
SK2_INPUT14: C160.2 U10.9(IN_11)
SK2_INPUT15: C163.2 U10.11(IN_13)
SK2_INPUT16: C166.2 U10.12(IN_14)
SK2_INPUT17: C169.2 U10.13(IN_15)
SK2_INPUT18: C172.2 U10.19(IN_21)
SK2_INPUT19: C175.2 U10.18(IN_20)
SK2_INPUT20: C178.2 U10.26(IN_28)
